# Altium PCB Print.PcbDoc
Units mm, origin at the board's own origin, x right, y up, seen from the top; angles counter-clockwise.
Board outline 237.62 x 189.1 mm, 2 copper layers (Top Layer, Bottom Layer); 83 components, 0 nets, 506 pads, 0 vias.
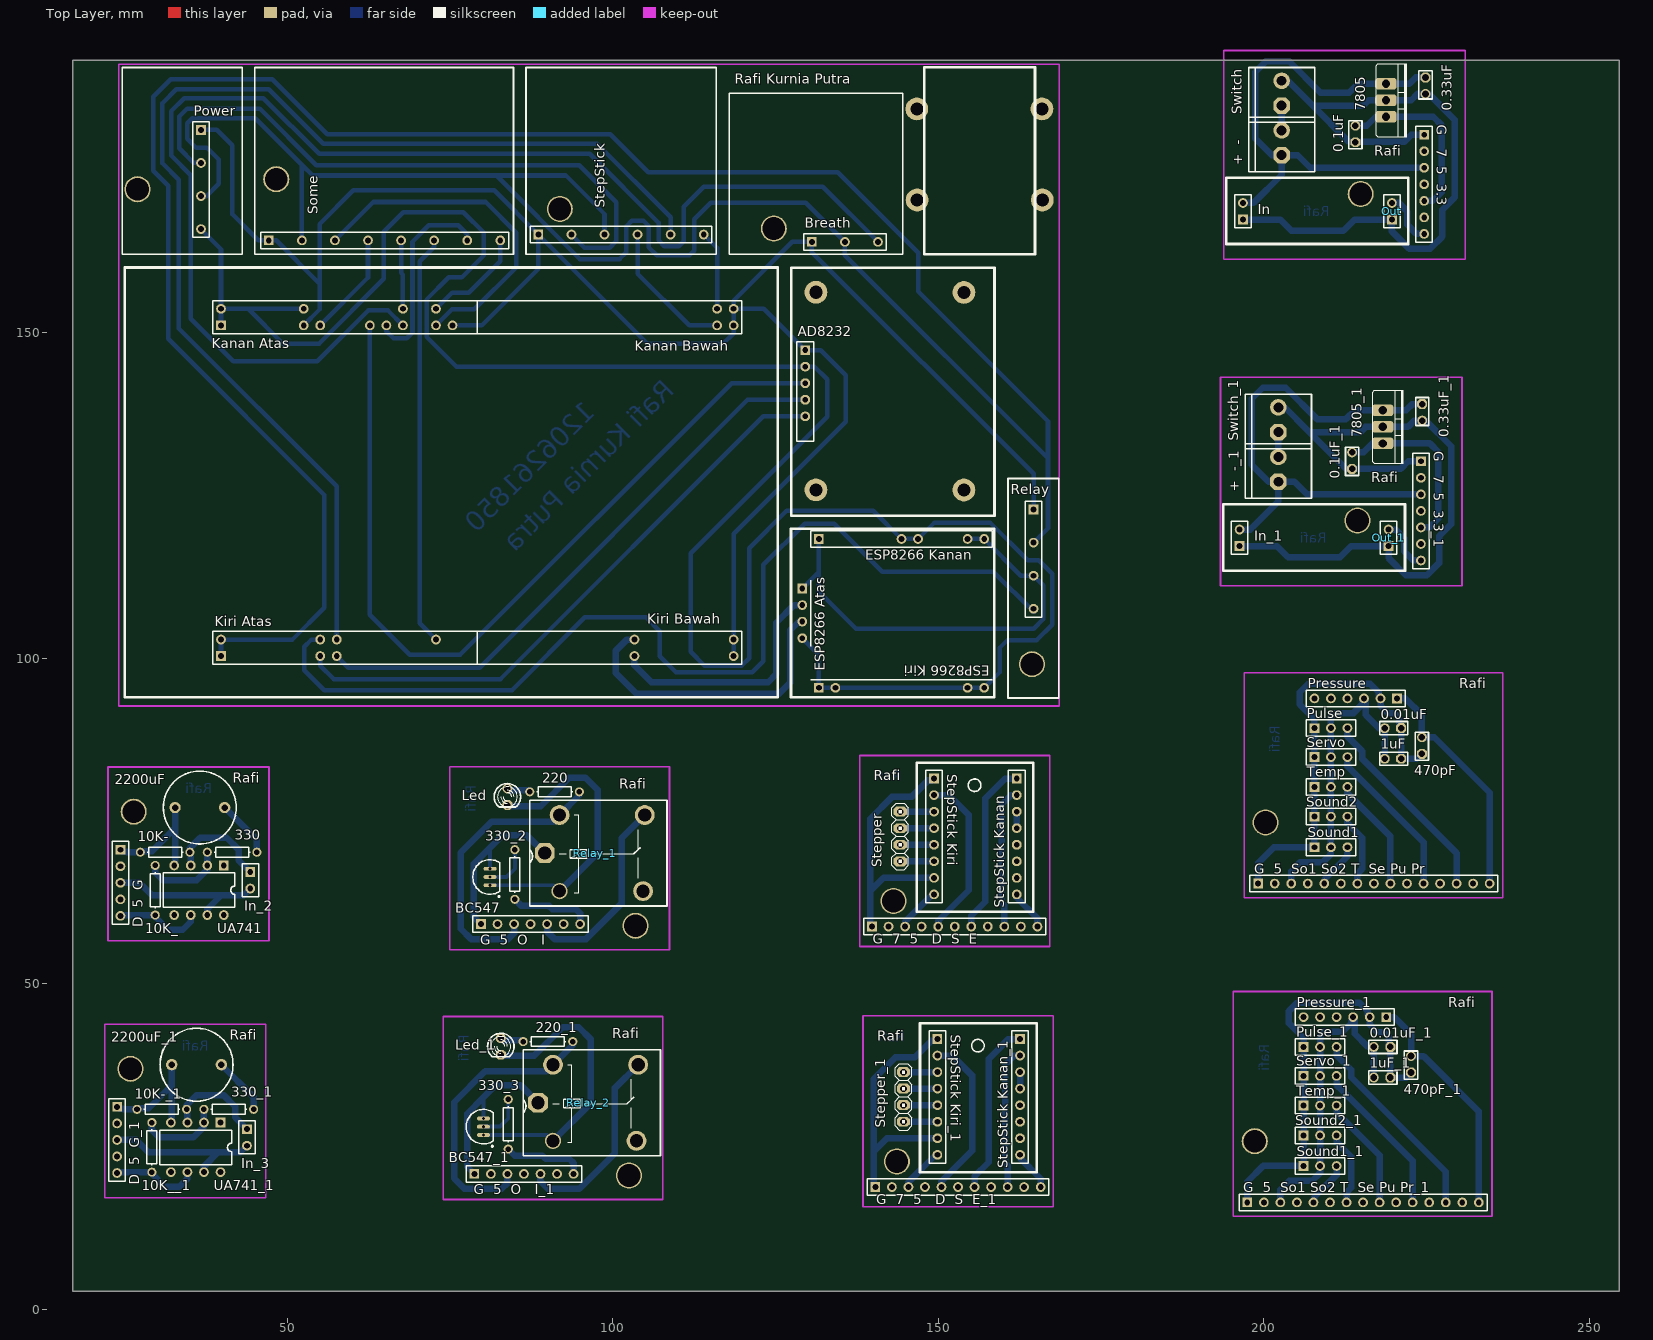
[diagram p0: Top Layer view]
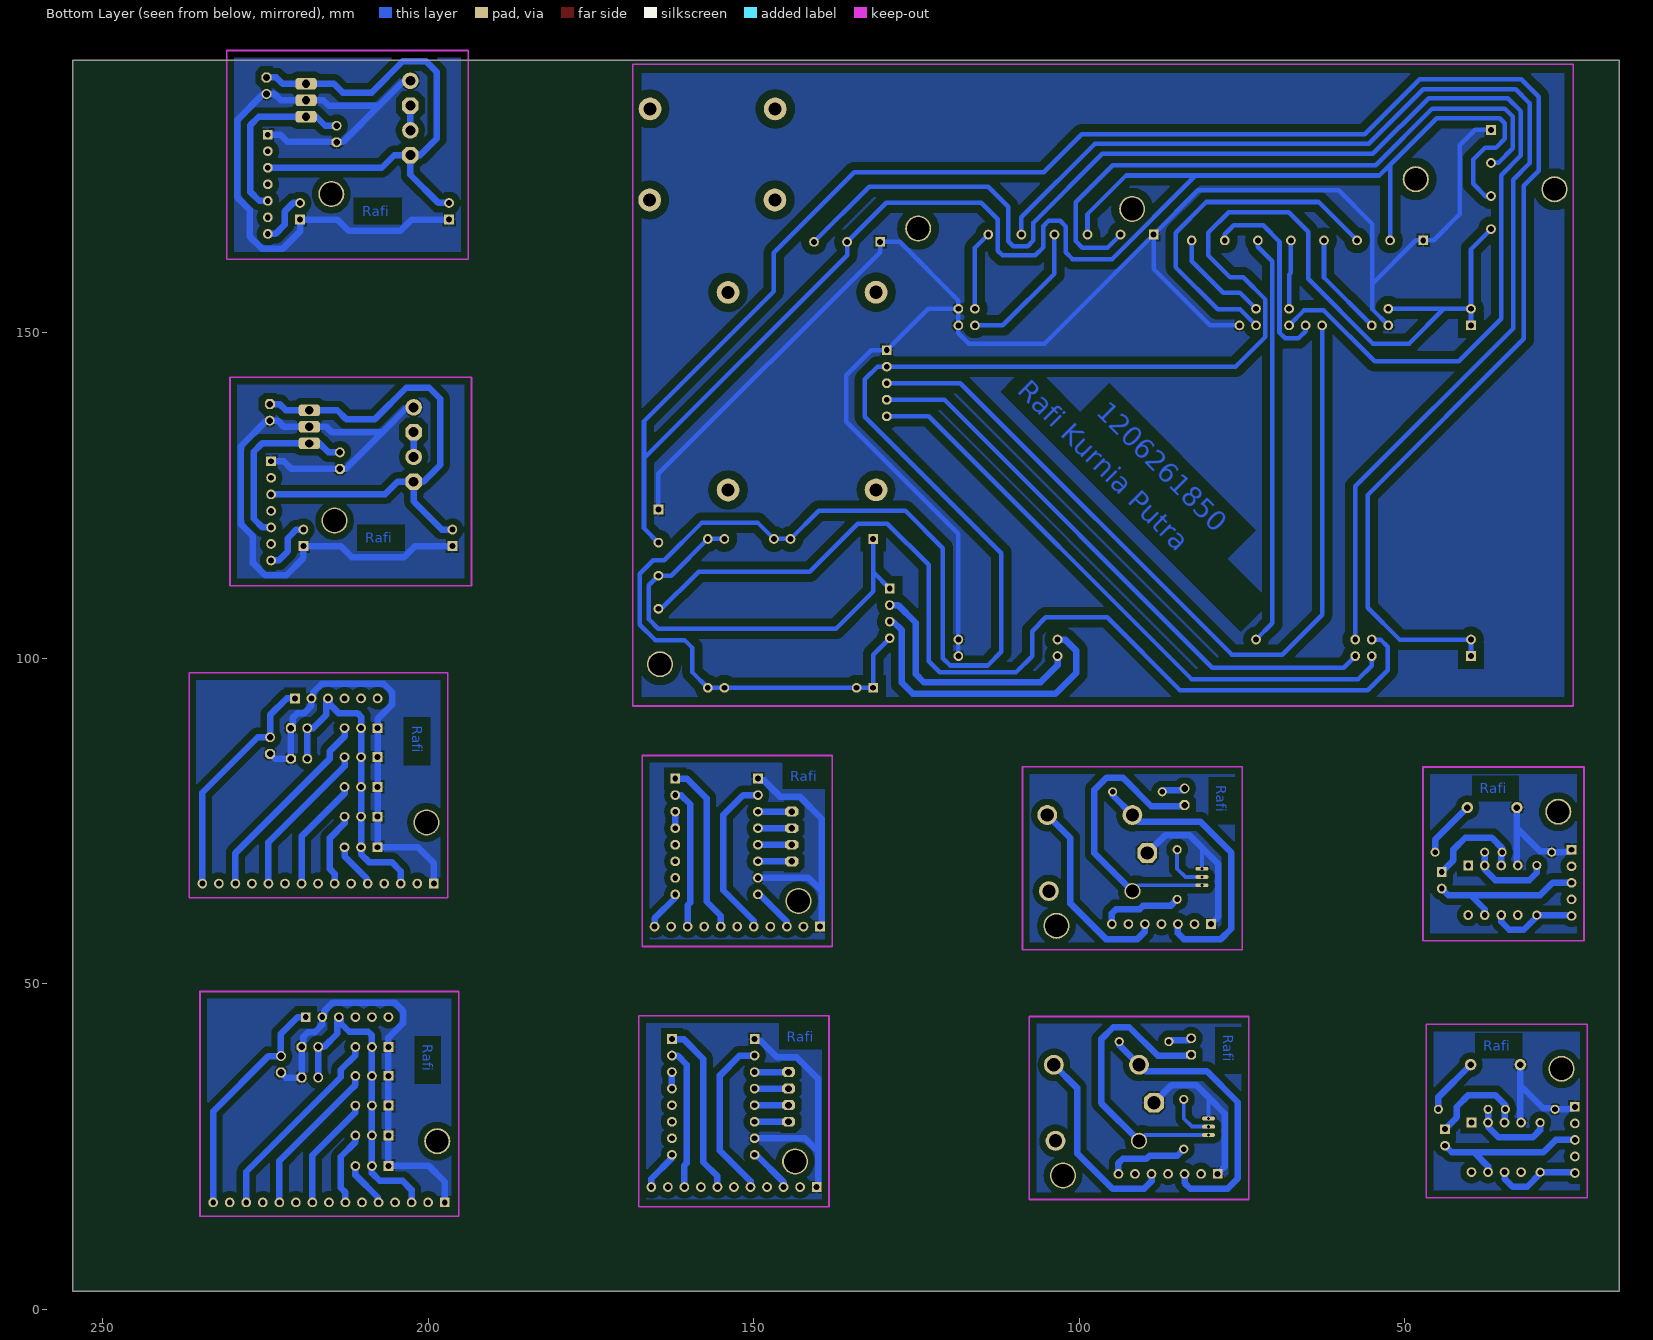
[diagram p1: Bottom Layer view, seen from below]

## Layer stack, top to bottom
Top Solder: solder mask 0.0102, Solder Resist, Dk 3.5
Top Layer: signal copper 0.0356
Dielectric 1: dielectric 0.32, FR-4, Dk 4.8
Bottom Layer: signal copper 0.0356
Bottom Solder: solder mask 0.0102, Solder Resist, Dk 3.5

## Board outline
17.018,2.794 17.018,191.897 254.635,191.897 254.635,2.794

## Design rules (kind name [scope] priority, off if disabled: settings)
Clearance [All] p1: gap=0.25
PolygonConnect [All] p1: connectstyle=Relief reliefconductorwidth=0.254 reliefentries=4 polygonreliefangle="90 Angle" airgapwidth=0.254
RoutingVias [All] p1: holewidth=0.711 width=1.27 viastyle="Through Hole" minholewidth=0.711 minwidth=1.27 maxholewidth=0.711 maxwidth=1.27
SolderMaskExpansion [All] p1: expansion=0.102
Width [All] p1: maxlimit=3 minlimit=0.254 preferedwidth=1
30 further rules are at their usual default settings.

## Components (designator, comment, footprint, x,y, rotation, side; value= is the part's Value field where it differs from the comment)
0.1uF "0.1uF" My_cap100n 214.071,180.543 r90 top
0.01uF "Cap" My_cap100n 219.837,89.281 r180 top
0.01uF_1 "Cap" My_cap100n 218.169,40.321 r180 top (schematic designator 0.01uF)
0.1uF_1 "0.1uF" My_cap100n 213.563,130.378 r90 top (schematic designator 0.1uF)
0.33uF "0.33uF" My_cap100n 224.841,187.96 r270 top
0.33uF_1 "0.33uF" My_cap100n 224.333,137.795 r270 top (schematic designator 0.33uF)
1uF "Cap" My_cap100n 219.837,84.582 r180 top
1uF_1 "Cap" My_cap100n 218.169,35.622 r180 top (schematic designator 1uF)
10K- "10K" AXIAL-0.3 31.242,70.231 r180 top (schematic designator 10K-2)
10K-_1 "10K" AXIAL-0.3 30.734,30.734 r180 top (schematic designator 10K-2)
10K_ "10K" AXIAL-0.3 29.718,64.389 r90 top (schematic designator "10K Juga")
10K__1 "10K" AXIAL-0.3 29.21,24.892 r90 top (schematic designator "10K Juga")
220 "Res1" AXIAL-0.3 91.059,79.502 r180 top
220_1 "Res1" AXIAL-0.3 90.043,41.148 r180 top (schematic designator 220)
330 "330" AXIAL-0.3 41.529,70.231 r180 top (schematic designator 330-2)
330_1 "330" AXIAL-0.3 41.021,30.734 r180 top (schematic designator 330-2)
330_2 "Res1" AXIAL-0.3 84.963,66.802 r90 top (schematic designator 330-1)
330_3 "Res1" AXIAL-0.3 83.947,28.448 r90 top (schematic designator 330-1)
470pF "Cap" My_cap100n 224.282,86.614 r90 top
470pF_1 "Cap" My_cap100n 222.614,37.654 r90 top (schematic designator 470pF)
2200uF "2200uF" RAD-0.3 36.576,77.089 r180 top
2200uF_1 "2200uF" RAD-0.3 36.068,37.592 r180 top (schematic designator 2200uF)
7805 "L7805" to220-123-v 218.77,188.265 r270 top (schematic designator U?)
7805_1 "L7805" to220-123-v 218.262,138.1 r270 top (schematic designator U?)
"+  -" "Power Connector" "My_ Power_Connector" 197.663,173.482 r90 top (schematic designator Power)
"+  -_1" "Power Connector" "My_ Power_Connector" 197.155,123.317 r90 top (schematic designator Power)
AD8232 "" HDR1X6#1 129.565,147.345 r270 top
BC547 "NPN" TO-226-AA 81.153,66.421 r0 top
BC547_1 "NPN" TO-226-AA 80.137,28.067 r0 top (schematic designator BC547)
Breath "Header 5" HDR1X5#1 130.581,163.982 r0 top
"D  5  G" "Header 5" HDR1X5#2 24.384,70.612 r270 top (schematic designator Out)
"D  5  G_1" "Header 5" HDR1X5#2 23.876,31.115 r270 top (schematic designator Out)
"ESP8266 Atas" "" HDR1X4 129.113,110.724 r270 top
"ESP8266 Kanan" "" HDR1X11#1 131.653,118.344 r0 top
"ESP8266 Kiri" "" HDR1X11#2 131.653,95.484 r0 top
"G  5  O   I" "Header 7" HDR1X7#1 79.756,59.182 r0 top (schematic designator P?)
"G  5  O   I_1" "Header 7" HDR1X7#1 78.74,20.828 r0 top (schematic designator P?)
"G  5  So1 So2 T  Se Pu Pr" "Header 15" HDR1X15#1 199.136,65.405 r0 top (schematic designator P?)
"G  5  So1 So2 T  Se Pu Pr_1" "Header 15" HDR1X15#1 197.468,16.445 r0 top (schematic designator P?)
"G  7  5   D  S  E" "Header 11" HDR1X11#3 139.827,58.801 r0 top (schematic designator P?)
"G  7  5   D  S  E_1" "Header 11" HDR1X11#3 140.335,18.796 r0 top (schematic designator P?)
"G   7  5  3.3" "Header 7" HDR1X7#1 224.638,180.442 r270 top (schematic designator P?)
"G   7  5  3.3_1" "Header 7" HDR1X7#1 224.13,130.277 r270 top (schematic designator P?)
In "Header 2" HDR1X2 196.792,167.41 r90 top
In_1 "Header 2" HDR1X2 196.284,117.245 r90 top (schematic designator In)
In_2 "Input" HDR1X2 44.323,67.183 r270 top (schematic designator PPP)
In_3 "Input" HDR1X2 43.815,27.686 r270 top (schematic designator PPP)
"Kanan Atas" "" HDR2X16#1 39.827,151.155 r0 top
"Kanan Bawah" "" HDR2X16#2 80.467,151.155 r0 top
"Kiri Atas" "" HDR2X16#3 39.827,100.355 r0 top
"Kiri Bawah" "" HDR2X16#4 80.467,100.355 r0 top
Led "LED" My_LED3MM 83.82,78.74 r270 top
Led_1 "LED" My_LED3MM 82.804,40.386 r270 top (schematic designator Led)
Out "Header 2" HDR1X2 219.678,167.41 r90 top
Out_1 "Header 2" HDR1X2 219.17,117.245 r90 top (schematic designator Out)
Power "Header 7" HDR1X7#2 36.754,181.178 r270 top
Pressure "Header 6" HDR1X6#2 220.472,93.853 r180 top
Pressure_1 "Header 6" HDR1X6#2 218.804,44.893 r180 top (schematic designator Pressure)
Pulse "" HDR1X3 207.772,89.281 r0 top
Pulse_1 "" HDR1X3 206.104,40.321 r0 top (schematic designator Pulse)
Relay "Header 7" HDR1X7#2 164.643,122.86 r270 top
Relay_1 "Relay-SPDT" My_rel 96.52,70.104 r90 top (schematic designator Relay)
Relay_2 "Relay-SPDT" My_rel 95.504,31.75 r90 top (schematic designator Relay)
Servo "" HDR1X3 207.772,84.836 r0 top
Servo_1 "" HDR1X3 206.104,35.876 r0 top (schematic designator Servo)
Some "Header 15" HDR1X15#2 47.168,164.211 r0 top
Sound1 "" HDR1X3 207.772,70.993 r0 top
Sound1_1 "" HDR1X3 206.104,22.033 r0 top (schematic designator Sound1)
Sound2 "" HDR1X3 207.772,75.692 r0 top
Sound2_1 "" HDR1X3 206.104,26.732 r0 top (schematic designator Sound2)
Stepper "" My_1X04 144.145,72.644 r270 top
Stepper_1 "" My_1X04 144.653,32.639 r270 top (schematic designator Stepper)
StepStick "Header 11" HDR1X11#4 88.57,165.1 r0 top
"StepStick Kanan" "" HDR1X8 162.052,81.534 r270 top
"StepStick Kanan_1" "" HDR1X8 162.56,41.529 r270 top (schematic designator "StepStick Kanan")
"StepStick Kiri" "" HDR1X8 149.352,81.534 r270 top
"StepStick Kiri_1" "" HDR1X8 149.86,41.529 r270 top (schematic designator "StepStick Kiri")
Switch "Power Connector" "My_ Power_Connector" 197.663,181.102 r90 top
Switch_1 "Power Connector" "My_ Power_Connector" 197.155,130.937 r90 top (schematic designator Switch)
Temp "" HDR1X3 207.772,80.264 r0 top (schematic designator Temperature)
Temp_1 "" HDR1X3 206.104,31.304 r0 top (schematic designator Temperature)
UA741 "UA741CN" DIP8 36.449,64.389 r180 top (schematic designator UA741CN)
UA741_1 "UA741CN" DIP8 35.941,24.892 r180 top (schematic designator UA741CN)

## Footprints (in the part's own frame and the unit in brackets; to place one, negate y for a bottom-side part, rotate by r counter-clockwise, add the part's x,y. Pads: shape width x height; smd on the part's side, far side on the other; paste and mask are expansions set on the pad)
AXIAL-0.3 [mm] "Axial Device, Thru-Hole; 2 Leads; 0.3 in Pin Spacing"
  round 1.4 hole 0.85: 1(-3.81,0) 2(3.81,0)
  silkscreen extent -2.77,-0.76 2.77,0.76
DIP8 [mm] "DIP; 8 Leads; Row Spacing 7.62 mm; Pitch 2.54 mm"
  rect 1.5x1.5 hole 0.9: 1(-3.81,-3.81)
  round 1.5 hole 0.9: 2(-1.27,-3.81) 3(1.27,-3.81) 4(3.81,-3.81) 5(3.81,3.81) 6(1.27,3.81) 7(-1.27,3.81) 8(-3.81,3.81)
  silkscreen extent -5.5,-2.65 5.5,2.65
HDR1X2 [mm] "Connector; Header; 2 Position"
  rect 1.5x1.5 hole 0.9: 1(0,0)
  round 1.5 hole 0.9: 2(2.54,0)
  silkscreen extent -1.27,-1.27 3.81,1.27
HDR1X3 [mm] "Connector; Header; 3 Position"
  rect 1.5x1.5 hole 0.9: 1(0,0)
  round 1.5 hole 0.9: 2(2.54,0) 3(5.08,0)
  silkscreen extent -1.27,-1.27 6.35,1.27
HDR1X4 [mm] "Connector; Header; 4 Position"
  rect 1.5x1.5 hole 0.9: 1(0,0)
  round 1.5 hole 0.9: 2(2.54,0) 3(5.08,0) 4(7.62,0)
  silkscreen extent -1.27,1.27 8.89,1.27
HDR1X5#1 [mm] "Connector; Header; 5 Position"
  rect 1.5x1.5 hole 0.9: 1(0,0)
  round 0 all layers, no hole: 2(2.54,0) 4(7.62,0)
  round 1.5 hole 0.9: 3(5.08,0) 5(10.16,0)
  silkscreen extent -1.27,-1.27 11.43,1.27
HDR1X5#2 [mm] "Connector; Header; 5 Position"
  rect 1.5x1.5 hole 0.9: 1(0,0)
  round 1.5 hole 0.9: 2(2.54,0) 3(5.08,0) 4(7.62,0) 5(10.16,0)
  silkscreen extent -1.27,-1.27 11.43,1.27
HDR1X6#1 [mm] "Connector; Header; 6 Position"
  rect 1.5x1.5 hole 0.9: 1(0,0)
  round 1.5 hole 0.9: 2(2.54,0) 3(5.08,0) 4(7.62,0) 5(10.16,0)
  round 0 all layers, no hole: 6(12.7,0)
  silkscreen extent -1.27,-1.27 13.97,1.27
HDR1X6#2 [mm] "Connector; Header; 6 Position"
  rect 1.5x1.5 hole 0.9: 1(0,0)
  round 1.5 hole 0.9: 2(2.54,0) 3(5.08,0) 4(7.62,0) 5(10.16,0) 6(12.7,0)
  silkscreen extent -1.27,-1.27 13.97,1.27
HDR1X7#1 [mm] "Connector; Header; 7 Position"
  rect 1.5x1.5 hole 0.9: 1(0,0)
  round 1.5 hole 0.9: 2(2.54,0) 3(5.08,0) 4(7.62,0) 5(10.16,0) 6(12.7,0) 7(15.24,0)
  silkscreen extent -1.27,-1.27 16.51,1.27
HDR1X7#2 [mm] "Connector; Header; 7 Position"
  rect 1.5x1.5 hole 0.9: 1(0,0)
  round 0 all layers, no hole: 2(2.54,0) 4(7.62,0) 6(12.7,0)
  round 1.5 hole 0.9: 3(5.08,0) 5(10.16,0) 7(15.24,0)
  silkscreen extent -1.27,-1.27 16.51,1.27
HDR1X8 [mm] "Connector; Header; 8 Position"
  rect 1.5x1.5 hole 0.9: 1(0,0)
  round 1.5 hole 0.9: 2(2.54,0) 3(5.08,0) 4(7.62,0) 5(10.16,0) 6(12.7,0) 7(15.24,0) 8(17.78,0)
  silkscreen extent -1.27,-1.27 19.05,1.27
HDR1X11#1 [mm] "Connector; Header; 11 Position"
  rect 1.5x1.5 hole 0.9: 1(0,0)
  round 0 all layers, no hole: 2(2.54,0) 3(5.08,0) 4(7.62,0) 5(10.16,0) 8(17.78,0) 9(20.32,0)
  round 1.5 hole 0.9: 6(12.7,0) 7(15.24,0) 10(22.86,0) 11(25.4,0)
  silkscreen extent -1.27,-1.27 26.67,1.27
HDR1X11#2 [mm] "Connector; Header; 11 Position"
  rect 1.5x1.5 hole 0.9: 1(0,0)
  round 1.5 hole 0.9: 2(2.54,0) 10(22.86,0) 11(25.4,0)
  round 0 all layers, no hole: 3(5.08,0) 4(7.62,0) 5(10.16,0) 6(12.7,0) 7(15.24,0) 8(17.78,0) 9(20.32,0)
  silkscreen extent -1.27,1.27 26.67,1.27
HDR1X11#3 [mm] "Connector; Header; 11 Position"
  rect 1.5x1.5 hole 0.9: 1(0,0)
  round 1.5 hole 0.9: 2(2.54,0) 3(5.08,0) 4(7.62,0) 5(10.16,0) 6(12.7,0) 7(15.24,0) 8(17.78,0) 9(20.32,0) 10(22.86,0) 11(25.4,0)
  silkscreen extent -1.27,-1.27 26.67,1.27
HDR1X11#4 [mm] "Connector; Header; 11 Position"
  rect 1.5x1.5 hole 0.9: 1(0,0)
  round 0 all layers, no hole: 2(2.54,0) 4(7.62,0) 6(12.7,0) 8(17.78,0) 10(22.86,0)
  round 1.5 hole 0.9: 3(5.08,0) 5(10.16,0) 7(15.24,0) 9(20.32,0) 11(25.4,0)
  silkscreen extent -1.27,-1.27 26.67,1.27
HDR1X15#1 [mm] "Connector; Header; 15 Position"
  rect 1.5x1.5 hole 0.9: 1(0,0)
  round 1.5 hole 0.9: 2(2.54,0) 3(5.08,0) 4(7.62,0) 5(10.16,0) 6(12.7,0) 7(15.24,0) 8(17.78,0) 9(20.32,0) 10(22.86,0) 11(25.4,0) 12(27.94,0) 13(30.48,0) 14(33.02,0) 15(35.56,0)
  silkscreen extent -1.27,-1.27 36.83,1.27
HDR1X15#2 [mm] "Connector; Header; 15 Position"
  rect 1.5x1.5 hole 0.9: 1(0,0)
  round 0 all layers, no hole: 2(2.54,0) 4(7.62,0) 6(12.7,0) 8(17.78,0) 10(22.86,0) 12(27.94,0) 14(33.02,0)
  round 1.5 hole 0.9: 3(5.08,0) 5(10.16,0) 7(15.24,0) 9(20.32,0) 11(25.4,0) 13(30.48,0) 15(35.56,0)
  silkscreen extent -1.27,-1.27 36.83,1.27
HDR2X16#1 [mm] "Connector; Header; 16x2 Position"
  rect 1.5x1.5 hole 0.9: 1(0,0)
  round 1.5 hole 0.9: 2(0,2.54) 11(12.7,0) 12(12.7,2.54) 13(15.24,0) 19(22.86,0) 21(25.4,0) 23(27.94,0) 24(27.94,2.54) 27(33.02,0) 28(33.02,2.54) 29(35.56,0)
  round 0 all layers, no hole: 3(2.54,0) 4(2.54,2.54) 5(5.08,0) 6(5.08,2.54) 7(7.62,0) 8(7.62,2.54) 9(10.16,0) 10(10.16,2.54) 14(15.24,2.54) 15(17.78,0) 16(17.78,2.54) 17(20.32,0) 18(20.32,2.54) 20(22.86,2.54) 22(25.4,2.54) 25(30.48,0) 26(30.48,2.54) 30(35.56,2.54) 31(38.1,0) 32(38.1,2.54)
  silkscreen extent -1.27,-1.27 39.37,3.81
HDR2X16#2 [mm] "Connector; Header; 16x2 Position"
  rect 0x0 all layers, no hole: 1(0,0)
  round 0 all layers, no hole: 2(0,2.54) 3(2.54,0) 4(2.54,2.54) 5(5.08,0) 6(5.08,2.54) 7(7.62,0) 8(7.62,2.54) 9(10.16,0) 10(10.16,2.54) 11(12.7,0) 12(12.7,2.54) 13(15.24,0) 14(15.24,2.54) 15(17.78,0) 16(17.78,2.54) 17(20.32,0) 18(20.32,2.54) 19(22.86,0) 20(22.86,2.54) 21(25.4,0) 22(25.4,2.54) 23(27.94,0) 24(27.94,2.54) 25(30.48,0) 26(30.48,2.54) 27(33.02,0) 28(33.02,2.54)
  round 1.5 hole 0.9: 29(35.56,0) 30(35.56,2.54) 31(38.1,0) 32(38.1,2.54)
  silkscreen extent -1.27,-1.27 39.37,3.81
HDR2X16#3 [mm] "Connector; Header; 16x2 Position"
  rect 1.5x1.5 hole 0.9: 1(0,0)
  round 1.5 hole 0.9: 2(0,2.54) 13(15.24,0) 14(15.24,2.54) 15(17.78,0) 16(17.78,2.54) 28(33.02,2.54)
  round 0 all layers, no hole: 3(2.54,0) 4(2.54,2.54) 5(5.08,0) 6(5.08,2.54) 7(7.62,0) 8(7.62,2.54) 9(10.16,0) 10(10.16,2.54) 11(12.7,0) 12(12.7,2.54) 17(20.32,0) 18(20.32,2.54) 19(22.86,0) 20(22.86,2.54) 21(25.4,0) 22(25.4,2.54) 23(27.94,0) 24(27.94,2.54) 25(30.48,0) 26(30.48,2.54) 27(33.02,0) 29(35.56,0) 30(35.56,2.54) 31(38.1,0) 32(38.1,2.54)
  silkscreen extent -1.27,-1.27 39.37,3.81
HDR2X16#4 [mm] "Connector; Header; 16x2 Position"
  rect 0x0 all layers, no hole: 1(0,0)
  round 0 all layers, no hole: 2(0,2.54) 3(2.54,0) 4(2.54,2.54) 5(5.08,0) 6(5.08,2.54) 7(7.62,0) 8(7.62,2.54) 9(10.16,0) 10(10.16,2.54) 11(12.7,0) 12(12.7,2.54) 13(15.24,0) 14(15.24,2.54) 15(17.78,0) 16(17.78,2.54) 17(20.32,0) 18(20.32,2.54) 21(25.4,0) 22(25.4,2.54) 23(27.94,0) 24(27.94,2.54) 25(30.48,0) 26(30.48,2.54) 27(33.02,0) 28(33.02,2.54) 29(35.56,0) 30(35.56,2.54)
  round 1.5 hole 0.9: 19(22.86,0) 20(22.86,2.54) 31(38.1,0) 32(38.1,2.54)
  silkscreen extent -1.27,-1.27 39.37,3.81
My_1X04 [mil]
  oct 60x80 hole 40: 1(-150,0) 2(-50,0) 3(50,0) 4(150,0)
  silkscreen extent -200,-50 200,50
"My_ Power_Connector" [mil]
  oct 100x100 hole 60: 1(150,-200)
  round 100 hole 60: 2(300,-200)
  silkscreen extent 50,-400 380,0
My_cap100n [mil]
  oct 60x60 hole 40: 1(-50,0)
  round 60 hole 40: 2(50,0)
  silkscreen extent -90,-40 80,40
My_LED3MM [mil]
  round 60 hole 40: A(-50,0)
  oct 60x60 hole 40: K(50,0)
  silkscreen extent -80,-80 62,80
My_rel [mil]
  oct 120x120 hole 80: 1(-0.5,274.5)
  round 120 hole 80: 2(-230.5,-320.5) 3(229.5,-330.5) 5(229.5,184.5)
  round 98.43 hole 78.74: 4(-230.5,184.5)
  silkscreen extent -320,-466 320,365
RAD-0.3 [mm] "Radial Cap, Thru-Hole; 2 Leads; 0.3 in Pin Spacing"
  round 1.75 hole 1: 1(-3.81,0) 2(3.81,0)
to220-123-v [mil] "TO220 123 pin numbering Vertical mount"
  rrect50% 70x130 hole 50: 1(0,0) 2(100,0) 3(200,0)
  silkscreen extent -120,-60 320,125, body extent -121,-59 321,126, height 945
TO-226-AA [mm] "TO, Flat Index; 3 In-Line, Axial Leads; Body Dia. 4.8mm; Leads 0.55 x 0.51 mm (max)"
  oval 2x0.6 hole 0.5: 1(0,-1.27) 2(0,0) 3(0,1.27)
  silkscreen extent -2.65,-3.13 1.52,2.65, body extent -2.66,-2.66 1.52,2.66, height 5.33

## Part data
0.1uF 0.01uF 0.01uF_1 0.1uF_1 0.33uF 0.33uF_1 1uF 1uF_1 470pF 470pF_1: library part "Cap ceramic", "CAP-100Nf"
10K- 10K-_1 10K_ 10K__1 330 330_1: library part Res1, "Resistor"
220 220_1 330_2 330_3: "Resistor"
2200uF 2200uF_1: library part Cap, "Capacitor"
7805 7805_1: library part L7805-TO220, "LINEAR REGULATOR 5.0V"
"+  -" "+  -_1" Switch Switch_1: "white Power Connector"
AD8232: library part "Header 6", "Header, 6-Pin"
BC547 BC547_1: "NPN Bipolar Transistor"
Breath "D  5  G" "D  5  G_1": "Header, 5-Pin"
"ESP8266 Atas" Stepper Stepper_1: library part "Header 4", "Header, 4-Pin"
"ESP8266 Kanan" "ESP8266 Kiri": library part "Header 11", "Header, 11-Pin"
"G  5  O   I" "G  5  O   I_1" "G   7  5  3.3" "G   7  5  3.3_1" Power Relay: "Header, 7-Pin"
"G  5  So1 So2 T  Se Pu Pr" "G  5  So1 So2 T  Se Pu Pr_1" Some: "Header, 15-Pin"
"G  7  5   D  S  E" "G  7  5   D  S  E_1" StepStick: "Header, 11-Pin"
In In_1 Out Out_1: "Header, 2-Pin"
In_2 In_3: library part "Header 2", "Header, 2-Pin"
"Kanan Atas" "Kanan Bawah" "Kiri Atas" "Kiri Bawah": library part "Header 16X2", "Header, 16-Pin, Dual row"
Led Led_1: "Typical INFRARED GaAs LED"
Pressure Pressure_1: "Header, 6-Pin"
Pulse Pulse_1 Servo Servo_1 Sound1 Sound1_1 Sound2 Sound2_1 Temp Temp_1: library part "Header 3", "Header, 3-Pin"
Relay_1 Relay_2: "standard single contact relay"
"StepStick Kanan" "StepStick Kanan_1" "StepStick Kiri" "StepStick Kiri_1": library part "Header 8", "Header, 8-Pin"
UA741 UA741_1: "General-Purpose Single Operational Amplifier"

## Free pads (board coordinates)
  round 3.5 hole 2: 0(146.7,184.4) 1(165.925,184.401) 2(165.976,170.405) 3(146.751,170.405) 6(153.94,125.861) 7(131.207,125.886) 8(131.207,156.239) 9(153.94,156.214)
  round 4 hole 3.5: 8(25.908,36.957) 8(26.416,76.454) 8(27,172.06) 8(124.739,166.014) 8(214.376,121.158) 8(214.884,171.323) 10(48.311,173.609) 10(91.872,169.037) 10(102.489,20.574) 10(103.505,58.928) 10(143.129,62.738) 10(143.637,22.733) 10(164.389,99.111) 10(198.611,25.843) 10(200.279,74.803)

## Nets (pads, with @x,y where several pads share a name; then routed paths per layer and width w, separated by ;. In a path a pad name is that pad's centre, name@x,y a point inside that pad or via, vN(x,y) a via of type N, cw(c..) or ccw(c..) an arc to the next point about the centre after c; other vN are vias at no path point)
pads on no net: 0.01uF.1 0.1uF.1 0.01uF.2 0.1uF.2 0.01uF_1.1 0.1uF_1.1 0.01uF_1.2 0.1uF_1.2 0.33uF.1 0.33uF.2 0.33uF_1.1 0.33uF_1.2 1uF.1 1uF.2 1uF_1.1 1uF_1.2 10K-.1 10K-.2 10K-_1.1 10K-_1.2 10K_.1 10K_.2 10K__1.1 10K__1.2 220.1 220.2 220_1.1 220_1.2 330.1 330.2 330_1.1 330_1.2 330_2.1 330_2.2 330_3.1 330_3.2 470pF.1 470pF.2 470pF_1.1 470pF_1.2 2200uF.1 2200uF.2 2200uF_1.1 2200uF_1.2 7805.1 7805.2 7805.3 7805_1.1 7805_1.2 7805_1.3 "+  -.1" "+  -.2" "+  -_1.1" "+  -_1.2" "D  5  G.1" "D  5  G.2" "D  5  G.3" "D  5  G.4" "D  5  G.5" "D  5  G_1.1" "D  5  G_1.2" "D  5  G_1.3" "D  5  G_1.4" "D  5  G_1.5" "ESP8266 Atas.1" "ESP8266 Atas.2" "ESP8266 Atas.3" "ESP8266 Atas.4" "ESP8266 Kanan.1" "ESP8266 Kanan.2" "ESP8266 Kanan.3" "ESP8266 Kanan.4" "ESP8266 Kanan.5" "ESP8266 Kanan.6" "ESP8266 Kanan.7" "ESP8266 Kanan.8" "ESP8266 Kanan.9" "ESP8266 Kanan.10" "ESP8266 Kanan.11" "ESP8266 Kiri.1" "ESP8266 Kiri.2" "ESP8266 Kiri.3" "ESP8266 Kiri.4" "ESP8266 Kiri.5" "ESP8266 Kiri.6" "ESP8266 Kiri.7" "ESP8266 Kiri.8" "ESP8266 Kiri.9" "ESP8266 Kiri.10" "ESP8266 Kiri.11" "G  5  O   I.1" "G  5  O   I.2" "G  5  O   I.3" "G  5  O   I.4" "G  5  O   I.5" "G  5  O   I.6" "G  5  O   I.7" "G  5  O   I_1.1" "G  5  O   I_1.2" "G  5  O   I_1.3" "G  5  O   I_1.4" "G  5  O   I_1.5" "G  5  O   I_1.6" "G  5  O   I_1.7" "G  5  So1 So2 T  Se Pu Pr.1" "G  5  So1 So2 T  Se Pu Pr.2" "G  5  So1 So2 T  Se Pu Pr.3" "G  5  So1 So2 T  Se Pu Pr.4" "G  5  So1 So2 T  Se Pu Pr.5" "G  5  So1 So2 T  Se Pu Pr.6" "G  5  So1 So2 T  Se Pu Pr.7" "G  5  So1 So2 T  Se Pu Pr.8" "G  5  So1 So2 T  Se Pu Pr.9" "G  5  So1 So2 T  Se Pu Pr.10" "G  5  So1 So2 T  Se Pu Pr.11" "G  5  So1 So2 T  Se Pu Pr.12" "G  5  So1 So2 T  Se Pu Pr.13" "G  5  So1 So2 T  Se Pu Pr.14" "G  5  So1 So2 T  Se Pu Pr.15" "G  5  So1 So2 T  Se Pu Pr_1.1" "G  5  So1 So2 T  Se Pu Pr_1.2" "G  5  So1 So2 T  Se Pu Pr_1.3" "G  5  So1 So2 T  Se Pu Pr_1.4" "G  5  So1 So2 T  Se Pu Pr_1.5" "G  5  So1 So2 T  Se Pu Pr_1.6" "G  5  So1 So2 T  Se Pu Pr_1.7" "G  5  So1 So2 T  Se Pu Pr_1.8" "G  5  So1 So2 T  Se Pu Pr_1.9" "G  5  So1 So2 T  Se Pu Pr_1.10" "G  5  So1 So2 T  Se Pu Pr_1.11" "G  5  So1 So2 T  Se Pu Pr_1.12" "G  5  So1 So2 T  Se Pu Pr_1.13" "G  5  So1 So2 T  Se Pu Pr_1.14" "G  5  So1 So2 T  Se Pu Pr_1.15" "G  7  5   D  S  E.1" "G  7  5   D  S  E.2" "G  7  5   D  S  E.3" "G  7  5   D  S  E.4" "G  7  5   D  S  E.5" "G  7  5   D  S  E.6" "G  7  5   D  S  E.7" "G  7  5   D  S  E.8" "G  7  5   D  S  E.9" "G  7  5   D  S  E.10" "G  7  5   D  S  E.11" "G  7  5   D  S  E_1.1" "G  7  5   D  S  E_1.2" "G  7  5   D  S  E_1.3" "G  7  5   D  S  E_1.4" "G  7  5   D  S  E_1.5" "G  7  5   D  S  E_1.6" "G  7  5   D  S  E_1.7" "G  7  5   D  S  E_1.8" "G  7  5   D  S  E_1.9" "G  7  5   D  S  E_1.10" "G  7  5   D  S  E_1.11" "G   7  5  3.3.1" "G   7  5  3.3.2" "G   7  5  3.3.3" "G   7  5  3.3.4" "G   7  5  3.3.5" "G   7  5  3.3.6" "G   7  5  3.3.7" "G   7  5  3.3_1.1" "G   7  5  3.3_1.2" "G   7  5  3.3_1.3" "G   7  5  3.3_1.4" "G   7  5  3.3_1.5" "G   7  5  3.3_1.6" "G   7  5  3.3_1.7" "Kanan Atas.1" "Kanan Atas.2" "Kanan Atas.3" "Kanan Atas.4" "Kanan Atas.5" "Kanan Atas.6" "Kanan Atas.7" "Kanan Atas.8" "Kanan Atas.9" "Kanan Atas.10" "Kanan Atas.11" "Kanan Atas.12" "Kanan Atas.13" "Kanan Atas.14" "Kanan Atas.15" "Kanan Atas.16" "Kanan Atas.17" "Kanan Atas.18" "Kanan Atas.19" "Kanan Atas.20" "Kanan Atas.21" "Kanan Atas.22" "Kanan Atas.23" "Kanan Atas.24" "Kanan Atas.25" "Kanan Atas.26" "Kanan Atas.27" "Kanan Atas.28" "Kanan Atas.29" "Kanan Atas.30" "Kanan Atas.31" "Kanan Atas.32" "Kanan Bawah.1" "Kanan Bawah.2" "Kanan Bawah.3" "Kanan Bawah.4" "Kanan Bawah.5" "Kanan Bawah.6" "Kanan Bawah.7" "Kanan Bawah.8" "Kanan Bawah.9" "Kanan Bawah.10" "Kanan Bawah.11" "Kanan Bawah.12" "Kanan Bawah.13" "Kanan Bawah.14" "Kanan Bawah.15" "Kanan Bawah.16" "Kanan Bawah.17" "Kanan Bawah.18" "Kanan Bawah.19" "Kanan Bawah.20" "Kanan Bawah.21" "Kanan Bawah.22" "Kanan Bawah.23" "Kanan Bawah.24" "Kanan Bawah.25" "Kanan Bawah.26" "Kanan Bawah.27" "Kanan Bawah.28" "Kanan Bawah.29" "Kanan Bawah.30" "Kanan Bawah.31" "Kanan Bawah.32" "Kiri Atas.1" "Kiri Atas.2" "Kiri Atas.3" "Kiri Atas.4" "Kiri Atas.5" "Kiri Atas.6" "Kiri Atas.7" "Kiri Atas.8" "Kiri Atas.9" "Kiri Atas.10" "Kiri Atas.11" "Kiri Atas.12" "Kiri Atas.13" "Kiri Atas.14" "Kiri Atas.15" "Kiri Atas.16" "Kiri Atas.17" "Kiri Atas.18" "Kiri Atas.19" "Kiri Atas.20" "Kiri Atas.21" "Kiri Atas.22" "Kiri Atas.23" "Kiri Atas.24" "Kiri Atas.25" "Kiri Atas.26" "Kiri Atas.27" "Kiri Atas.28" "Kiri Atas.29" "Kiri Atas.30" "Kiri Atas.31" "Kiri Atas.32" "Kiri Bawah.1" "Kiri Bawah.2" "Kiri Bawah.3" "Kiri Bawah.4" "Kiri Bawah.5" "Kiri Bawah.6" "Kiri Bawah.7" "Kiri Bawah.8" "Kiri Bawah.9" "Kiri Bawah.10" "Kiri Bawah.11" "Kiri Bawah.12" "Kiri Bawah.13" "Kiri Bawah.14" "Kiri Bawah.15" "Kiri Bawah.16" "Kiri Bawah.17" "Kiri Bawah.18" "Kiri Bawah.19" "Kiri Bawah.20" "Kiri Bawah.21" "Kiri Bawah.22" "Kiri Bawah.23" "Kiri Bawah.24" "Kiri Bawah.25" "Kiri Bawah.26" "Kiri Bawah.27" "Kiri Bawah.28" "Kiri Bawah.29" "Kiri Bawah.30" "Kiri Bawah.31" "Kiri Bawah.32" "StepStick Kanan.1" "StepStick Kanan.2" "StepStick Kanan.3" "StepStick Kanan.4" "StepStick Kanan.5" "StepStick Kanan.6" "StepStick Kanan.7" "StepStick Kanan.8" "StepStick Kanan_1.1" "StepStick Kanan_1.2" "StepStick Kanan_1.3" "StepStick Kanan_1.4" "StepStick Kanan_1.5" "StepStick Kanan_1.6" "StepStick Kanan_1.7" "StepStick Kanan_1.8" "StepStick Kiri.1" "StepStick Kiri.2" "StepStick Kiri.3" "StepStick Kiri.4" "StepStick Kiri.5" "StepStick Kiri.6" "StepStick Kiri.7" "StepStick Kiri.8" "StepStick Kiri_1.1" "StepStick Kiri_1.2" "StepStick Kiri_1.3" "StepStick Kiri_1.4" "StepStick Kiri_1.5" "StepStick Kiri_1.6" "StepStick Kiri_1.7" "StepStick Kiri_1.8" AD8232.1 AD8232.2 AD8232.3 AD8232.4 AD8232.5 AD8232.6 BC547.1 BC547.2 BC547.3 BC547_1.1 BC547_1.2 BC547_1.3 Breath.1 Breath.2 Breath.3 Breath.4 Breath.5 In.1 In.2 In_1.1 In_1.2 In_2.1 In_2.2 In_3.1 In_3.2 Led.A Led.K Led_1.A Led_1.K Out.1 Out.2 Out_1.1 Out_1.2 Power.1 Power.2 Power.3 Power.4 Power.5 Power.6 Power.7 Pressure.1 Pressure.2 Pressure.3 Pressure.4 Pressure.5 Pressure.6 Pressure_1.1 Pressure_1.2 Pressure_1.3 Pressure_1.4 Pressure_1.5 Pressure_1.6 Pulse.1 Pulse.2 Pulse.3 Pulse_1.1 Pulse_1.2 Pulse_1.3 Relay.1 Relay.2 Relay.3 Relay.4 Relay.5 Relay.6 Relay.7 Relay_1.1 Relay_1.2 Relay_1.3 Relay_1.4 Relay_1.5 Relay_2.1 Relay_2.2 Relay_2.3 Relay_2.4 Relay_2.5 Servo.1 Servo.2 Servo.3 Servo_1.1 Servo_1.2 Servo_1.3 Some.1 Some.2 Some.3 Some.4 Some.5 Some.6 Some.7 Some.8 Some.9 Some.10 Some.11 Some.12 Some.13 Some.14 Some.15 Sound1.1 Sound1.2 Sound1.3 Sound1_1.1 Sound1_1.2 Sound1_1.3 Sound2.1 Sound2.2 Sound2.3 Sound2_1.1 Sound2_1.2 Sound2_1.3 Stepper.1 Stepper.2 Stepper.3 Stepper.4 Stepper_1.1 Stepper_1.2 Stepper_1.3 Stepper_1.4 StepStick.1 StepStick.2 StepStick.3 StepStick.4 StepStick.5 StepStick.6 StepStick.7 StepStick.8 StepStick.9 StepStick.10 StepStick.11 Switch.1 Switch.2 Switch_1.1 Switch_1.2 Temp.1 Temp.2 Temp.3 Temp_1.1 Temp_1.2 Temp_1.3 UA741.1 UA741.2 UA741.3 UA741.4 UA741.5 UA741.6 UA741.7 UA741.8 UA741_1.1 UA741_1.2 UA741_1.3 UA741_1.4 UA741_1.5 UA741_1.6 UA741_1.7 UA741_1.8
copper on no net: | length 4274.4
  Bottom Layer w0.6: 80.137,26.797 89.916,26.797 90.818,25.895 ; 80.137,28.067 82.677,28.067 83.947,29.337 83.947,32.258 ; 80.137,29.337 80.137,32.574 ; 81.153,65.151 90.932,65.151 91.834,64.249 ; 81.153,66.421 83.693,66.421 84.963,67.691 84.963,70.612 ; 81.153,67.691 81.153,70.928
  Bottom Layer w0.7: 36.754,165.938 39.827,162.865 39.827,153.695 ; 36.754,171.018 37.617,171.018 39.497,172.898 39.497,176.632 37.668,178.46 35.992,178.46 34.62,179.832 34.62,182.22 35.382,182.982 45.081,182.982 52.248,175.815 ; 36.754,176.098 35.662,176.098 33.401,178.359 33.401,183.236 34.62,184.455 45.761,184.455 54.448,175.768 94.869,175.768 100.559,170.078 100.559,164.109 99.543,163.093 95.656,163.093 93.65,165.1 ; 36.754,181.178 39.192,181.178 41.529,178.841 41.529,168.25 45.568,164.211 47.168,164.211 48.285,164.211 54.966,157.531 ; 39.827,100.355 39.827,102.895 50.8,102.895 55.677,107.772 55.677,125.095 31.699,149.073 31.699,172.593 29.413,174.879 29.413,186.258 32.106,188.951 47.676,188.951 56.134,180.492 99.593,180.492 105.435,174.65 134.569,174.65 146.914,162.306 146.914,156.362 166.853,136.423 166.853,119.99 164.643,117.78 ; 39.827,151.155 39.827,153.695 ; 43.993,153.695 49.327,148.361 54.889,148.361 64.846,158.318 64.846,165.557 67.843,168.554 77.038,168.554 80.213,165.379 80.213,161.925 76.835,158.547 74.828,158.547 71.397,155.116 71.397,149.405 75.997,144.805 129.565,144.805 130.988,144.805 132.944,142.85 132.944,137.135 111.963,116.154 111.963,101.016 114.074,98.905 119.835,98.905 120.955,100.025 120.955,116.916 126.695,122.657 140.04,122.657 144.353,118.344 146.893,118.344 149.352,120.802 158.013,120.802 163.754,115.062 165.43,115.062 167.488,113.005 167.488,105.181 165.125,102.819 160.63,102.819 159.41,101.6 159.41,97.841 157.053,95.484 154.513,95.484 134.193,95.484 131.653,95.484 131.653,100.564 129.113,103.104 ; 52.248,164.211 52.248,175.815 ; 52.527,151.155 54.966,153.594 54.966,166.711 60.136,171.882 81.788,171.882 88.57,165.1 ; 52.527,153.695 39.827,153.695 ; 55.067,100.355 55.067,98.882 57.125,96.825 82.753,96.825 123.114,137.185 129.565,137.185 ; 55.067,102.895 53.721,102.895 52.603,101.778 52.603,98.196 55.677,95.123 84.531,95.123 95.707,106.299 105.131,106.299 107.245,104.184 107.245,100.324 109.713,97.855 121.427,97.855 123.139,99.568 123.139,114.376 129.464,120.701 134.01,120.701 141.376,113.335 158.445,113.335 164.643,107.137 ; 55.067,151.155 62.408,158.496 62.408,164.211 ; 57.328,164.211 63.221,170.104 80.467,170.104 85.166,165.405 85.166,160.045 78.74,153.619 75.311,153.619 72.847,151.155 ; 57.607,100.355 59.385,98.577 79.553,98.577 120.701,139.725 129.565,139.725 ; 57.607,102.895 57.607,126.416 33.35,150.673 33.35,173.533 30.836,176.047 30.836,185.293 32.969,187.427 47.142,187.427 55.524,179.045 97.587,179.045 108.89,167.742 108.89,165.1 ; 62.687,151.155 62.687,106.68 68.822,100.545 76.542,100.545 118.262,142.265 129.565,142.265 ; 65.227,151.155 65.227,150.266 66.319,149.174 68.377,149.174 69.24,150.038 69.24,164.008 71.755,166.522 76.276,166.522 77.648,165.151 77.648,164.211 ; 67.488,164.211 67.488,159.233 67.767,158.953 67.767,153.695 ; 67.767,151.155 65.481,153.441 62.433,153.441 54.635,145.644 41.732,145.644 35.196,152.18 35.196,174.227 32.182,177.241 32.182,184.074 34.163,186.055 46.33,186.055 54.889,177.495 96.444,177.495 107.036,166.903 107.036,164.211 107.925,163.322 110.134,163.322 110.896,164.084 110.896,169.393 113.97,172.466 132.258,172.466 140.741,163.982 ; 72.568,164.211 72.568,163.22 70.333,160.985 70.333,105.41 72.847,102.895 ; 72.847,153.695 75.317,156.166 77.908,156.166 82.728,160.985 82.728,164.211 ; 75.387,151.155 79.908,151.155 88.57,159.817 88.57,165.1 ; 82.156,174.13 94.945,161.341 101.041,161.341 102.057,162.357 102.057,166.345 102.921,167.208 104.724,167.208 105.537,166.395 105.537,163.119 106.756,161.9 111.785,161.9 112.497,162.611 112.497,167.437 115.062,170.002 129.642,170.002 135.661,163.982 135.661,161.925 166.853,130.734 ; 98.73,165.1 98.73,168.25 92.812,174.168 53.895,174.168 52.248,175.815 ; 103.81,165.1 103.81,159.08 111.735,151.155 116.027,151.155 ; 113.97,165.1 116.027,163.043 116.027,153.695 ; 118.567,100.355 118.567,102.895 118.567,119.126 135.788,136.347 135.788,143.51 131.953,147.345 129.565,147.345 123.215,153.695 118.567,153.695 ; 129.113,110.724 131.653,113.264 131.653,118.344 131.653,110.282 137.363,104.572 164.643,104.572 166.116,106.045 166.116,111.227 164.643,112.7 162.697,112.7 157.053,118.344 154.513,118.344 ; 164.643,122.86 164.643,128.346 130.581,162.408 130.581,163.982 127.584,163.982 118.567,154.965 118.567,153.695 ; 88.57,165.1 105.334,148.336 116.942,148.336 118.567,149.962 118.567,151.155 118.567,153.695
  Bottom Layer w1: 23.876,20.955 24.003,21.082 29.21,21.082 29.21,20.821 31.199,18.832 33.437,18.832 34.671,20.066 34.671,21.082 ; 23.876,26.035 26.797,26.035 28.702,24.13 39.37,24.13 ; 23.876,31.115 24.166,30.825 24.808,30.825 24.899,30.734 26.924,30.734 27.092,30.902 28.743,30.902 32.258,34.417 32.258,37.592 32.258,28.829 32.131,28.702 ; 24.384,60.452 24.511,60.579 29.718,60.579 29.718,60.318 31.707,58.329 33.945,58.329 35.179,59.563 35.179,60.579 ; 24.384,65.532 27.305,65.532 29.21,63.627 39.878,63.627 ; 24.384,70.612 24.674,70.322 25.316,70.322 25.407,70.231 27.432,70.231 27.6,70.399 29.251,70.399 32.766,73.914 32.766,77.089 32.766,68.326 32.639,68.199 ; 29.21,28.702 29.21,27.559 30.353,26.416 35.567,26.416 37.211,28.06 37.211,28.702 37.211,30.734 ; 29.718,68.199 29.718,67.056 30.861,65.913 36.075,65.913 37.719,67.557 37.719,68.199 37.719,70.231 ; 34.671,28.702 34.671,30.607 34.544,30.734 34.544,31.369 36.109,32.934 40.218,32.934 42.012,31.14 42.012,29.489 43.815,27.686 ; 35.179,68.199 35.179,70.104 35.052,70.231 35.052,70.866 36.617,72.431 40.726,72.431 42.52,70.637 42.52,68.986 44.323,67.183 ; 37.211,21.082 37.211,21.971 39.37,24.13 ; 37.719,60.579 37.719,61.468 39.878,63.627 ; 39.878,37.592 44.831,32.639 44.831,30.734 ; 40.386,77.089 45.339,72.136 45.339,70.231 ; 43.815,25.146 42.799,24.13 39.37,24.13 ; 44.323,64.643 43.307,63.627 39.878,63.627 ; 78.74,20.828 77.637,21.931 77.637,30.074 80.137,32.574 82.021,34.458 85.811,34.458 88.532,31.737 ; 79.756,59.182 78.653,60.285 78.653,68.428 81.153,70.928 83.037,72.812 86.827,72.812 89.548,70.091 ; 82.804,39.116 82.804,38.948 87.91,38.948 92.31,43.348 94.764,43.348 96.647,41.465 96.647,31.725 90.818,25.895 ; 82.804,41.656 83.082,41.378 86.233,41.378 86.233,41.148 ; 83.82,20.828 83.82,19.431 82.931,18.542 77.216,18.542 75.637,20.121 75.637,31.822 80.391,36.576 89.814,36.576 90.818,37.579 93.853,40.615 93.853,41.148 ; 83.82,77.47 83.82,77.302 88.926,77.302 93.326,81.702 95.78,81.702 97.663,79.819 97.663,70.079 91.834,64.249 ; 83.82,80.01 84.098,79.732 87.249,79.732 87.249,79.502 ; 83.947,24.638 84.963,23.622 89.202,23.622 89.679,23.145 93.314,23.145 93.98,22.479 93.98,20.828 ; 84.836,59.182 84.836,57.785 83.947,56.896 78.232,56.896 76.653,58.475 76.653,70.176 81.407,74.93 90.83,74.93 91.834,75.933 94.869,78.969 94.869,79.502 ; 84.963,62.992 85.979,61.976 90.218,61.976 90.695,61.499 94.33,61.499 94.996,60.833 94.996,59.182 ; 88.9,20.828 88.9,19.685 90.043,18.542 94.876,18.542 100.33,23.996 100.33,34.011 103.899,37.579 ; 89.916,59.182 89.916,58.039 91.059,56.896 95.892,56.896 101.346,62.35 101.346,72.365 104.915,75.933 ; 103.327,100.355 103.327,98.958 105.943,96.342 123.878,96.342 125.12,97.585 125.12,105.461 127.843,108.184 129.113,108.184 ; 103.327,102.895 102.184,102.895 100.432,101.143 100.432,97.79 103.657,94.564 125.552,94.564 127.229,96.241 127.229,104.318 128.554,105.644 129.113,105.644 ; 139.954,58.928 139.549,59.333 139.549,75.376 142.889,78.716 145.892,78.716 148.42,81.244 149.062,81.244 149.352,81.534 ; 139.954,64.643 141.605,66.294 149.352,66.294 ; 140.462,18.923 140.057,19.328 140.057,35.371 143.397,38.711 146.4,38.711 148.928,41.239 149.57,41.239 149.86,41.529 ; 140.462,24.638 142.113,26.289 149.86,26.289 ; 144.145,68.834 149.352,68.834 ; 144.145,71.374 149.352,71.374 ; 144.145,73.914 149.352,73.914 ; 144.145,76.454 149.352,76.454 ; 144.653,28.829 149.86,28.829 ; 144.653,31.369 149.86,31.369 ; 144.653,33.909 149.86,33.909 ; 144.653,36.449 149.86,36.449 ; 144.907,58.801 144.907,59.563 149.098,63.754 149.352,63.754 ; 145.415,18.796 145.415,19.558 149.606,23.749 149.86,23.749 ; 149.352,78.994 151.638,78.994 154.686,75.946 154.686,64.389 149.987,59.69 149.987,58.801 ; 149.86,38.989 152.146,38.989 155.194,35.941 155.194,24.384 150.495,19.685 150.495,18.796 ; 155.067,58.801 155.067,60.452 157.226,62.611 157.226,78.486 160.274,81.534 162.052,81.534 ; 155.575,18.796 155.575,20.447 157.734,22.606 157.734,38.481 160.782,41.529 162.56,41.529 ; 160.147,58.801 160.147,62.103 159.766,62.484 159.766,77.597 161.163,78.994 162.052,78.994 ; 160.655,18.796 160.655,22.098 160.274,22.479 160.274,37.592 161.671,38.989 162.56,38.989 ; 162.052,63.754 162.052,63.246 165.227,60.071 165.227,58.801 ; 162.052,73.914 162.052,76.454 ; 162.56,23.749 162.56,23.241 165.735,20.066 165.735,18.796 ; 162.56,33.909 162.56,36.449 ; 196.284,117.245 202.006,117.245 203.732,115.519 211.722,115.519 213.448,117.245 219.17,117.245 219.17,115.424 221.808,112.787 225.062,112.787 226.924,114.649 226.924,118.761 228.797,120.634 228.797,132.578 224.85,136.525 224.333,136.525 223.114,136.525 222.148,135.56 218.262,135.56 215.616,135.56 214.764,134.708 207.049,134.708 206.807,134.95 ; 196.284,119.785 197.91,119.785 202.235,124.11 202.235,127.127 ; 196.792,167.41 202.514,167.41 204.24,165.684 212.23,165.684 213.956,167.41 219.678,167.41 219.678,165.589 222.316,162.952 225.57,162.952 227.432,164.814 227.432,168.926 229.305,170.799 229.305,182.743 225.358,186.69 224.841,186.69 223.622,186.69 222.656,185.725 218.77,185.725 216.124,185.725 215.272,184.873 207.557,184.873 207.315,185.115 ; 196.792,169.95 198.418,169.95 202.743,174.275 202.743,177.292 ; 197.468,16.445 197.468,19.62 199.881,22.033 206.104,22.033 206.104,26.732 206.104,31.304 206.104,35.876 206.104,40.321 206.104,41.711 203.854,43.961 203.854,45.825 205.172,47.143 214.656,47.143 215.974,45.825 215.974,45.183 216.264,44.893 216.264,43.75 217.431,42.583 218.447,42.583 219.161,41.869 219.161,40.599 219.439,40.321 219.439,35.622 221.852,35.622 222.614,36.384 ; 199.136,65.405 199.136,68.58 201.549,70.993 207.772,70.993 207.772,75.692 207.772,80.264 207.772,84.836 207.772,89.281 207.772,90.671 205.522,92.921 205.522,94.785 206.84,96.103 216.324,96.103 217.642,94.785 217.642,94.143 217.932,93.853 217.932,92.71 219.099,91.543 220.115,91.543 220.829,90.829 220.829,89.559 221.107,89.281 221.107,84.582 223.52,84.582 224.282,85.344 ; 202.235,130.937 202.235,134.747 ; 202.235,138.557 203.2,138.557 206.807,134.95 ; 202.548,16.445 202.548,18.35 203.945,19.747 207.44,19.747 208.644,20.952 208.644,22.033 208.644,26.732 208.644,31.304 208.644,35.876 208.644,40.321 208.644,42.089 209.198,42.643 212.116,42.643 213.434,43.961 213.434,44.603 213.724,44.893 213.974,44.643 213.974,42.357 216.01,40.321 216.899,40.321 216.899,35.622 ; 202.743,181.102 202.743,184.912 ; 202.743,188.722 203.708,188.722 207.315,185.115 ; 204.216,65.405 204.216,67.31 205.613,68.707 209.107,68.707 210.312,69.912 210.312,70.993 210.312,75.692 210.312,80.264 210.312,84.836 210.312,89.281 210.312,91.049 210.866,91.603 213.784,91.603 215.102,92.921 215.102,93.563 215.392,93.853 215.642,93.603 215.642,91.317 217.678,89.281 218.567,89.281 218.567,84.582 ; 207.755,16.445 207.755,17.214 211.184,20.643 211.184,22.033 ; 209.423,65.405 209.423,66.174 212.852,69.603 212.852,70.993 ; 211.184,26.732 211.184,25.716 213.434,23.466 213.434,18.695 212.708,17.969 212.708,16.445 ; 211.184,31.304 211.184,30.288 217.788,23.684 217.788,16.445 ; 211.184,35.876 211.184,34.479 212.109,33.554 212.116,33.554 222.868,22.802 222.868,16.445 ; 211.184,40.321 211.184,39.058 213.434,36.808 213.434,35.658 227.948,21.144 227.948,16.445 ; 212.852,75.692 212.852,74.676 215.102,72.426 215.102,67.655 214.376,66.929 214.376,65.405 ; 212.852,80.264 212.852,79.248 219.456,72.644 219.456,65.405 ; 212.852,84.836 212.852,83.439 213.777,82.514 213.784,82.514 224.536,71.762 224.536,65.405 ; 212.852,89.281 212.852,88.018 215.102,85.768 215.102,84.618 229.616,70.104 229.616,65.405 ; 213.563,131.648 215.316,131.648 216.687,133.02 218.262,133.02 225.527,133.02 226.797,131.75 226.797,121.463 225.45,120.117 224.13,120.117 ; 214.071,181.813 215.824,181.813 217.195,183.185 218.77,183.185 226.035,183.185 227.305,181.915 227.305,171.628 225.958,170.282 224.638,170.282 ; 218.804,44.893 220.074,44.893 222.614,42.353 222.614,38.924 224.519,38.924 233.028,30.415 233.028,16.445 ; 219.17,119.785 220.251,119.785 221.564,118.472 221.564,116.434 222.961,115.037 224.13,115.037 ; 219.678,169.95 220.759,169.95 222.072,168.637 222.072,166.599 223.469,165.202 224.638,165.202 ; 220.472,93.853 221.742,93.853 224.282,91.313 224.282,87.884 226.187,87.884 234.696,79.375 234.696,65.405 ; 224.13,125.197 206.629,125.197 204.699,127.127 202.235,127.127 ; 224.13,130.277 222.174,130.277 221.056,129.159 212.598,129.159 206.807,134.95 ; 224.333,139.065 222.825,139.065 221.86,138.1 218.262,138.1 213.964,138.1 212.618,136.754 208.642,136.754 208.641,136.755 208.182,136.755 203.383,141.554 199.822,141.554 198.145,139.878 198.145,129.718 200.736,127.127 202.235,127.127 ; 224.638,175.362 207.137,175.362 205.207,177.292 202.743,177.292 ; 224.638,180.442 222.682,180.442 221.564,179.324 213.106,179.324 207.315,185.115 ; 224.841,189.23 223.333,189.23 222.368,188.265 218.77,188.265 214.472,188.265 213.126,186.919 209.15,186.919 209.149,186.92 208.69,186.92 203.891,191.719 200.33,191.719 198.653,190.043 198.653,179.883 201.244,177.292 202.743,177.292

## Polygon pours and split planes (outlines as drawn)
no net on Bottom Layer "Bottom Layer-GND" (solid, pour order 18): 195.309,14.286 235.06,14.286 235.06,48.83 195.309,48.83 195.309,14.286
no net on Bottom Layer "Bottom Layer-GND" (solid, pour order 12): 138.43,15.748 138.43,45.085 167.64,45.085 167.64,15.748 138.43,15.748
no net on Bottom Layer "Bottom Layer-GND" (solid, pour order 19): 74.041,44.998 73.966,44.922 73.966,16.891 107.696,16.891 107.696,44.998 74.041,44.998
no net on Bottom Layer "Bottom Layer-GND" (solid, pour order 14): 21.971,17.145 46.696,17.145 46.696,43.815 21.971,43.815 21.971,17.145
no net on Bottom Layer "Bottom Layer-GND" (solid, pour order 21): 193.345,111.15 230.454,111.15 230.454,143.205 193.345,143.205 193.345,111.15
no net on Bottom Layer "Bottom Layer-GND" (solid, pour order 13): 137.922,55.753 137.922,85.09 167.132,85.09 167.132,55.753 137.922,55.753
no net on Bottom Layer "Bottom Layer-GND" (solid, pour order 20): 75.057,83.352 74.982,83.276 74.982,55.245 108.712,55.245 108.712,83.352 75.057,83.352
no net on Bottom Layer "Bottom Layer-GND" (solid, pour order 15): 22.479,56.642 47.204,56.642 47.204,83.312 22.479,83.312 22.479,56.642
no net on Bottom Layer "Bottom Layer-GND" (solid, pour order 22): 193.853,161.315 230.962,161.315 230.962,193.37 193.853,193.37 193.853,161.315
no net on Bottom Layer "Bottom Layer-GND" (solid, pour order 16): 24.13,191.262 24.13,92.685 168.58,92.685 168.58,191.262
no net on Bottom Layer "Bottom Layer-GND" (solid, pour order 5): 196.977,63.246 236.728,63.246 236.728,97.79 196.977,97.79 196.977,63.246

## Keep-outs
Keep-Out Layer:
  lines w0.254: 21.971,17.145 21.971,43.815 46.696,43.815 46.696,17.145 21.971,17.145 ; 22.479,56.642 22.479,83.312 47.204,83.312 47.204,56.642 22.479,56.642 ; 24.13,92.685 24.13,191.262 168.58,191.262 168.58,92.685 24.13,92.685 ; 73.966,16.891 73.966,44.998 107.696,44.998 107.696,16.891 73.966,16.891 ; 74.982,55.245 74.982,83.352 108.712,83.352 108.712,55.245 74.982,55.245 ; 137.922,55.753 167.132,55.753 167.132,85.09 137.922,85.09 137.922,55.753 ; 138.43,15.748 167.64,15.748 167.64,45.085 138.43,45.085 138.43,15.748 ; 193.345,111.15 230.454,111.15 230.454,143.205 193.345,143.205 193.345,111.15 ; 193.853,161.315 230.962,161.315 230.962,193.37 193.853,193.37 193.853,161.315 ; 195.309,14.286 235.06,14.286 235.06,48.83 195.309,48.83 195.309,14.286 ; 196.977,63.246 236.728,63.246 236.728,97.79 196.977,97.79 196.977,63.246

## Other copper
Bottom Layer:
  text "Rafi" at 210.16,167.945 h1.52
  text "Rafi Kurnia Putra" at 109.677,140.945 h3.05 r45
  text "1206261850" at 97.536,137.668 h3.05 r45
  text "Rafi" at 209.652,117.78 h1.52
  text "Rafi" at 202.489,89.687 h1.52 r90
  text "Rafi" at 144.399,81.153 h1.52
  text "Rafi" at 78.918,80.543 h1.52 r90
  text "Rafi" at 38.481,79.248 h1.52
  text "Rafi" at 77.902,42.189 h1.52 r90
  text "Rafi" at 144.907,41.148 h1.52
  text "Rafi" at 200.821,40.727 h1.52 r90
  text "Rafi" at 37.973,39.751 h1.52

## Silkscreen, mask and mechanical layers (free items; w line width, h text height)
Top Overlay:
  circle w0.254: c156.083,40.513 r0.967
  circle w0.254: c36.068,37.592 r5.6
  circle w0.254: c155.575,80.518 r0.967
  circle w0.254: c36.576,77.089 r5.6
  lines w0.254: 24.638,162.052 24.638,190.754 43.078,190.754 43.078,162.052 24.638,162.052 ; 45.009,162.052 84.76,162.052 84.76,190.754 45.009,190.754 45.009,162.052 ; 86.665,162.052 115.875,162.052 115.875,190.754 86.665,190.754 86.665,162.052 ; 117.881,162.077 117.881,186.803 144.551,186.803 144.551,162.077 117.881,162.077 ; 160.706,93.904 168.529,93.904 168.529,127.634 160.706,127.634 160.706,93.904
  lines w0.4: 25.044,94.005 25.044,160.045 125.349,160.045 125.349,94.005 25.044,94.005 ; 127.381,94.005 158.623,94.005 158.623,119.939 127.381,119.939 127.381,94.005 ; 127.39,121.927 158.632,121.927 158.632,160.027 127.39,160.027 127.39,121.927 ; 146.685,61.087 146.685,83.947 164.592,83.947 164.592,61.087 146.685,61.087 ; 147.193,21.082 147.193,43.942 165.1,43.942 165.1,21.082 147.193,21.082 ; 147.849,162.061 147.849,190.805 164.849,190.805 164.849,162.061 147.849,162.061 ; 193.751,113.487 221.691,113.487 221.691,123.647 193.751,123.647 193.751,113.487 ; 194.259,163.652 222.199,163.652 222.199,173.812 194.259,173.812 194.259,163.652
  text "Rafi Kurnia Putra" at 118.72,188.239 h1.52
  text "Rafi" at 216.992,177.241 h1.52
  text "Rafi" at 216.484,127.076 h1.52
  text "Rafi" at 229.997,95.377 h1.52
  text "Rafi" at 140.081,81.28 h1.52
  text "Rafi" at 41.656,80.899 h1.52
  text "Rafi" at 100.965,80.01 h1.52
  text "Rafi" at 228.329,46.417 h1.52
  text "Rafi" at 99.949,41.656 h1.52
  text "Rafi" at 41.148,41.402 h1.52
  text "Rafi" at 140.589,41.275 h1.52

## Dimensions
168.58,191.262 to 168.58,92.685 on Multi-Layer
180.137,184.023 to 180.137,85.446 on Multi-Layer